# Altium PCB UC-526 - 4.PcbDoc
Units mil, origin at the board's own origin, x right, y up, seen from the top; angles counter-clockwise.
Board outline 1574.8 x 1574.8 mil, 2 copper layers (Top Layer, Bottom Layer); 116 components, 127 nets, 544 pads, 98 vias.
Unrouted connection lines stored in the file: 5.
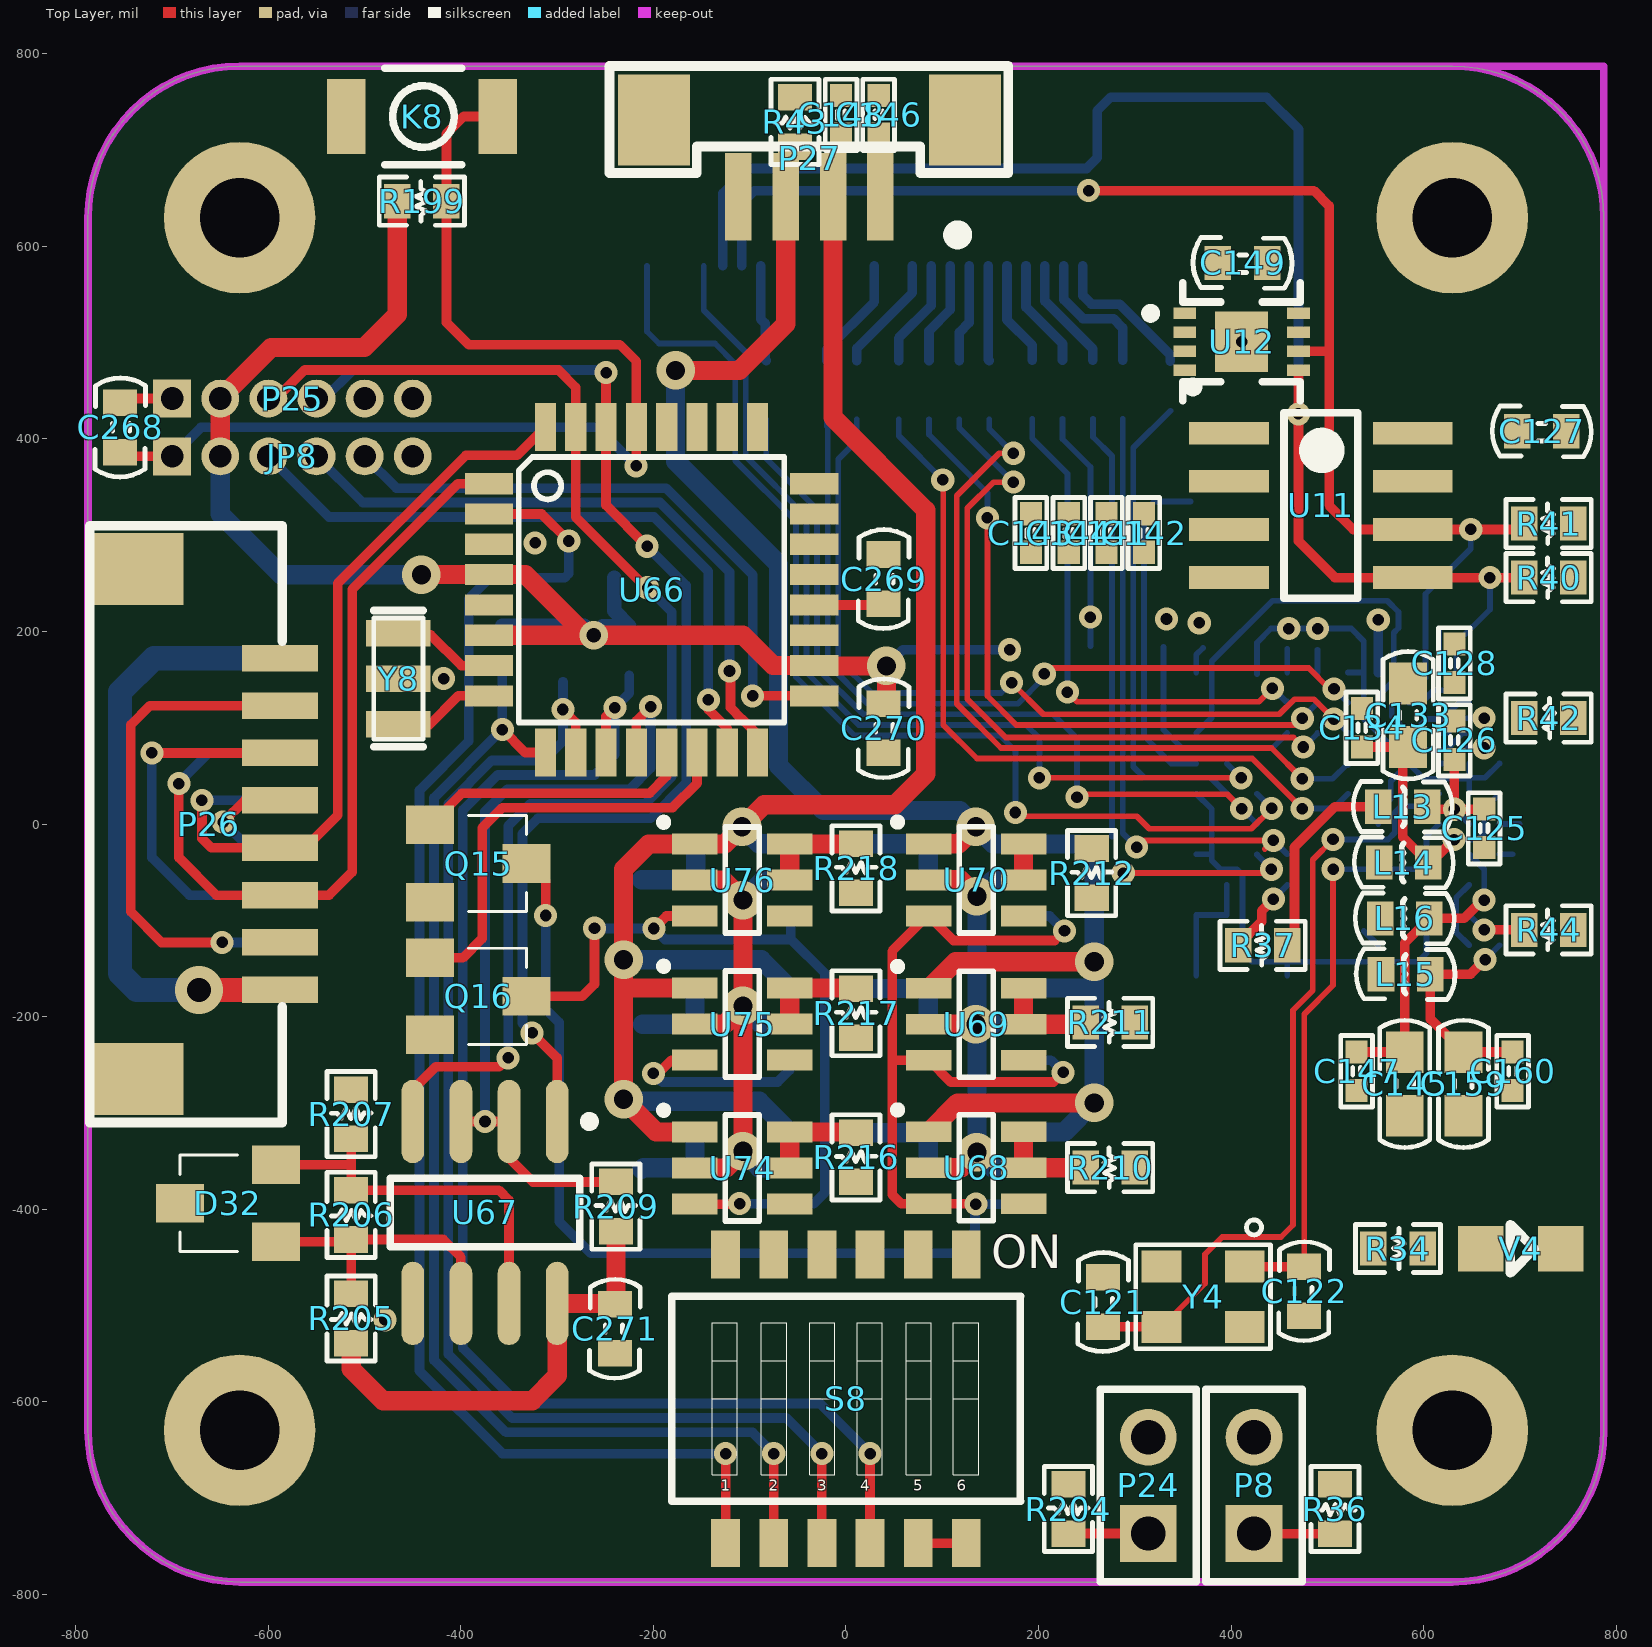
[diagram p0: Top Layer view]
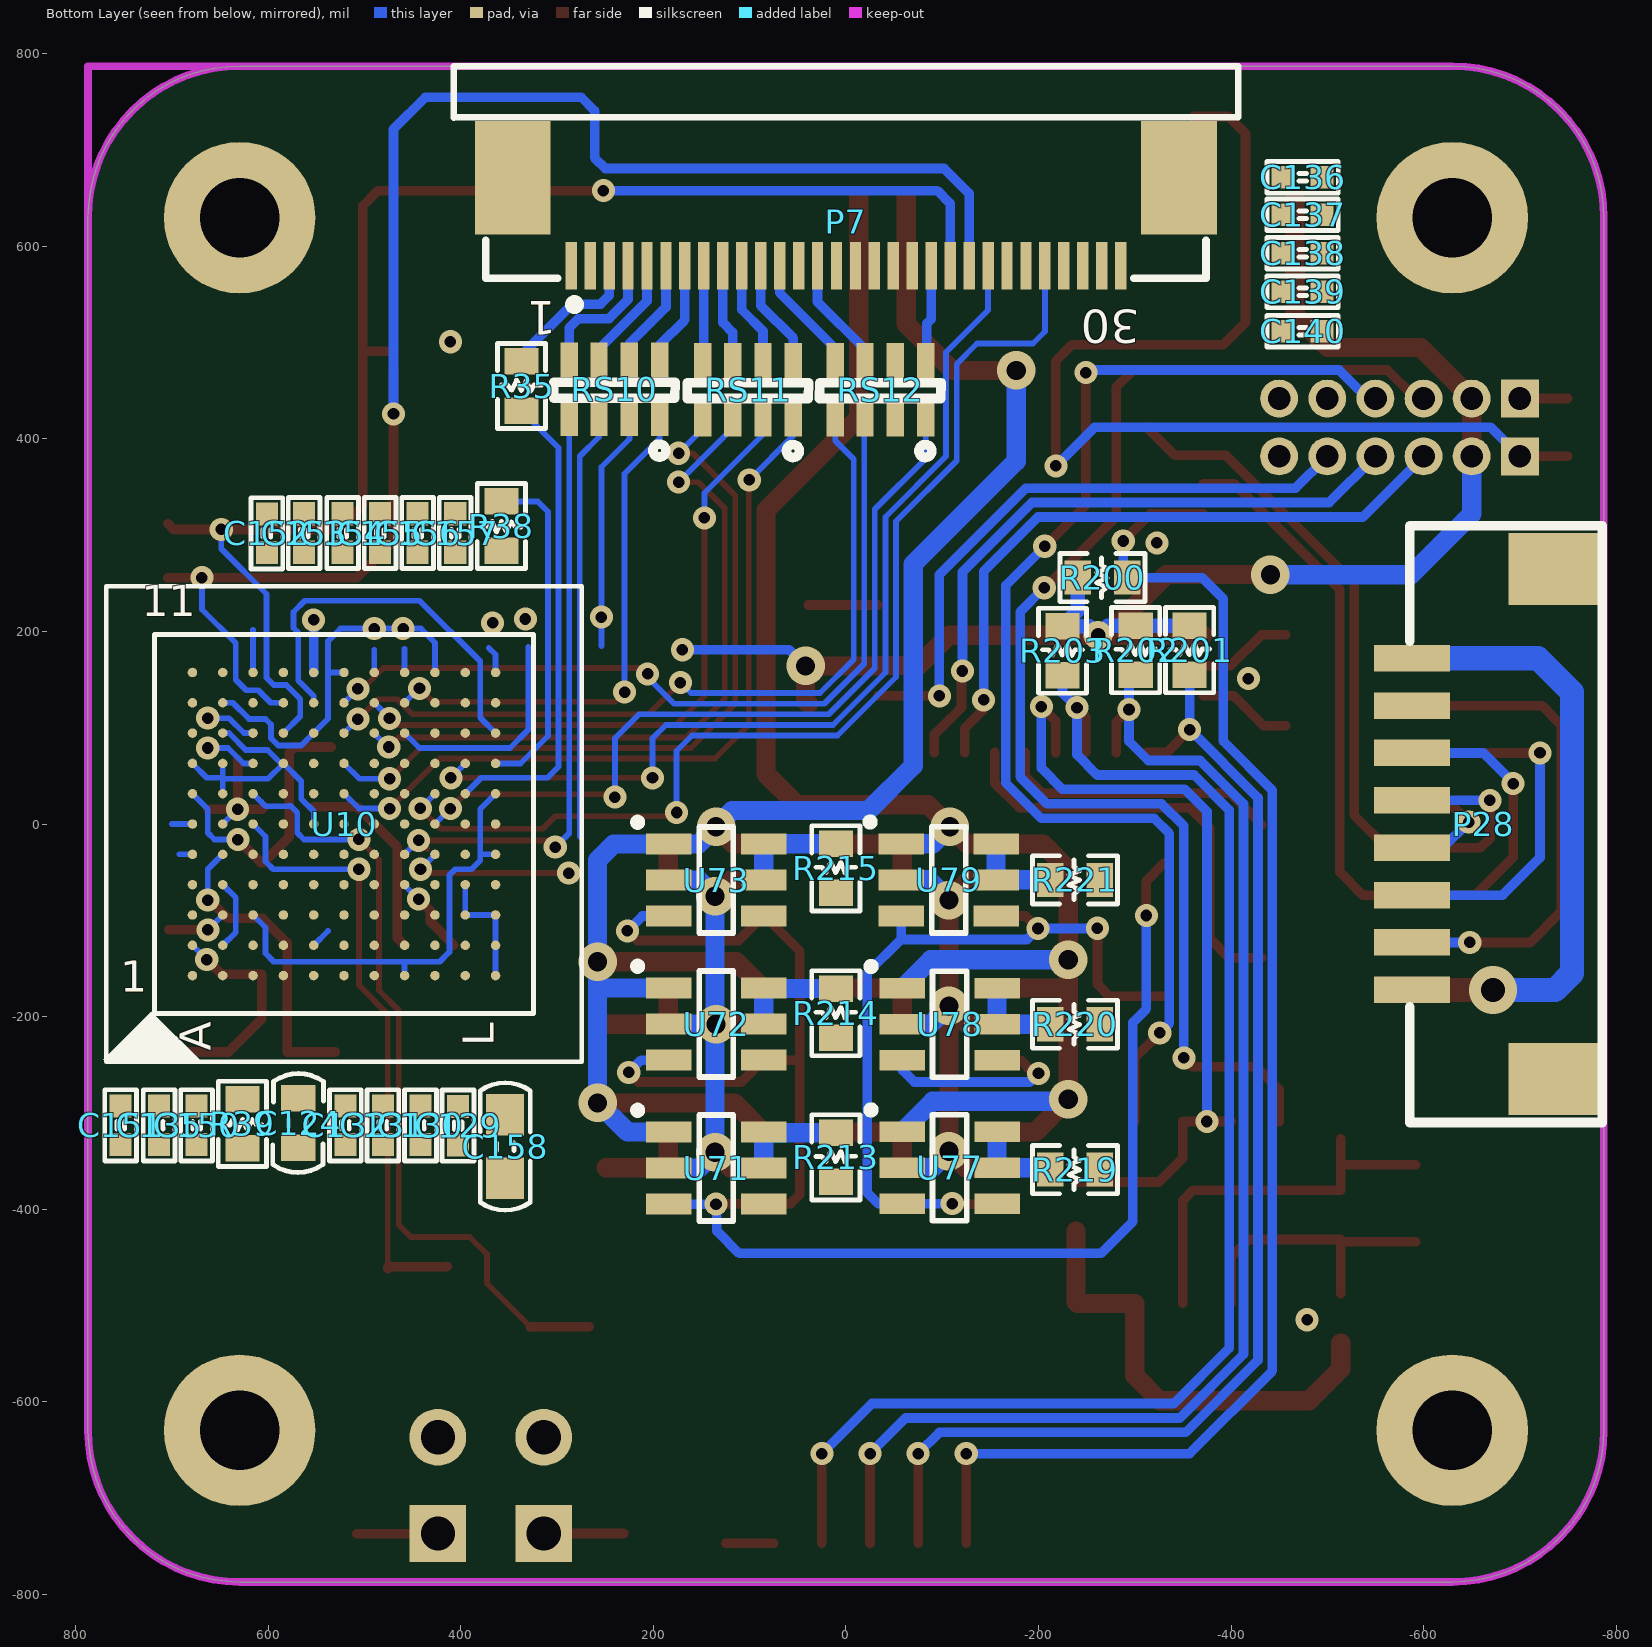
[diagram p1: Bottom Layer view, seen from below]

## Layer stack, top to bottom
Top Layer: signal copper 1.4
Dielectric: dielectric 12.6, FR-4, Dk 4.8
Bottom Layer: signal copper 1.4

## Board outline
-787.4,-629.92 -787.4,629.92 cw(c-629.92,629.92) -629.92,787.4 629.92,787.4 cw(c629.92,629.92) 787.4,629.92 787.4,-629.92 cw(c629.92,-629.92) 629.92,-787.4 -629.92,-787.4 cw(c-629.92,-629.92)

## Design rules (kind name [scope] priority, off if disabled: settings)
Clearance [All] p1: gap=5
DiffPairsRouting [All] p1: maxlimit=10 minlimit=10 mostfreqgap=10 maxuncoupledlength=500
PolygonConnect [All] p1: connectstyle=Relief reliefconductorwidth=10 reliefentries=4 polygonreliefangle="90 Angle"
RoutingVias [All] p1: holewidth=28 width=50 viastyle="Through Hole" minholewidth=28 minwidth=50 maxholewidth=28 maxwidth=50
SilkscreenOverComponentPads [All] p1: minsilkscreentomaskgap=10
SolderMaskExpansion [All] p1: expansion=4
Width [All] p1: maxlimit=50 minlimit=5 preferedwidth=10
26 further rules are at their usual default settings.

## Classes and differential pairs
differential pair SST: +SST_P -SST_N

## Components (designator, comment, footprint, x,y, rotation, side; value= is the part's Value field where it differs from the comment)
C121 "12pF" 0603S-CAP 267,-496.59 r270 top
C122 "12pF" 0603S-CAP 476,-485.41 r90 top
C124 "0.1u" 0603S-CAP 569,-310.59 r90 bottom
C125 "0.1u" C0402 663,-4.41 r270 top
C126 "0.01u" C0402 632,87 r90 top
C127 "0.1uF" 0603S-CAP 722.8,408 r180 top
C128 "0.1u" C0402 632,167 r90 top
C129 "0.01u" C0402 403,-313.31 r270 bottom
C130 "0.01u" C0402 442,-313 r270 bottom
C131 "0.01u" C0402 481,-313 r270 bottom
C132 "0.01u" C0402 520,-313 r270 bottom
C133 "2.2u" C0805S-CAP 584,113 r90 top
C134 "0.1u" C0402 536,100 r90 top
C135 "0.01u" C0402 713.5,-313 r270 bottom
C136 "0.01u" C0402 -474.31,671.84 r180 bottom
C137 "0.01u" C0402 -474.31,632.92 r180 bottom
C138 "0.01u" C0402 -474.31,592.92 r180 bottom
C139 "0.01u" C0402 -474.31,552.92 r180 bottom
C140 "0.01u" C0402 -474.31,511.92 r180 bottom
C141 "0.1u" C0402 270.5,302.31 r90 top
C142 "0.1u" C0402 309.5,302.31 r90 top
C143 "0.1u" C0402 192.08,302.31 r90 top
C144 "0.1u" C0402 231.5,302.31 r90 top
C145 "22u" C0805S-CAP 580.5,-270 r270 top
C146 "0.1u" C0402 34,736.63 r270 top
C147 "0.1u" C0402 530.5,-256.82 r270 top
C148 "0.1u" C0402 -5,736.63 r270 top
C149 "0.1u" 0603S-CAP 412,583 r180 top
C150 "0.1u" C0402 674.58,-313 r270 bottom
C151 "0.1u" C0402 753.5,-313 r270 bottom
C152 "0.1u" C0402 601.5,302 r90 bottom
C153 "0.1u" C0402 562.84,302.31 r90 bottom
C154 "0.1u" C0402 522.92,302.31 r90 bottom
C155 "0.1u" C0402 483.92,302.31 r90 bottom
C156 "0.1u" C0402 444.92,302.31 r90 bottom
C157 "0.1u" C0402 405.92,302.31 r90 bottom
C158 "22u" C0805S-CAP 354,-335 r270 bottom
C159 "22u" C0805S-CAP 641.5,-270 r270 top
C160 "0.1u" C0402 692.5,-256.82 r270 top
C268 "0.1uF" C0603 -754,412 r90 top
C269 "0.1uF" C0603 39,254.41 r90 top
C270 "0.1uF" C0603 39,99.41 r90 top
C271 "0.1u" C0603 -240,-524.39 r270 top
D32 "SM712" SOT23-3 -642,-394 r90 top
JP8 "Header 3X2" MHDR1X6 -700,382 r0 top
K8 "SW-PB" 157SW -519,735 r180 top
L13 "磁珠" L0603 578.41,18 r180 top
L14 "磁珠" L0603 579.41,-40 r0 top
L15 "磁珠" L0603 581.41,-156 r0 top
L16 "磁珠" L0603 580.41,-98 r0 top
P7 "30PIN" FH12-30S-0.5SH 0,625.55 r180 bottom locked
P8 "Header 2" HDR1X2 424,-737 r90 top
P24 "Header 2" HDR1X2 314,-737 r90 top
P25 "FTDI Basic" MHDR1X6 -700,442 r0 top
P26 "Header 8" SH_1.25MM*8 -735.66,0 r270 top locked
P27 "Header 4" SMT_1.25MM*4 -38,692 r0 top
P28 "Header 8" SH_1.25MM*8 -735.66,0 r90 bottom locked
Q15 "BSS138" "SOT-23 (STANDARD)" -432,-1 r270 top
Q16 "BSS138" "SOT-23 (STANDARD)" -432,-139 r270 top
R34 "10K" 0603S-RES 573.41,-441 r180 top
R35 "0" 0603S-RES 337,455 r270 bottom
R36 "4.7K" 0603S-RES 508,-711.59 r90 top
R37 "4.7K" 0603S-RES 432.88,-125.96 r0 top
R38 "4.7K" 0603S-RES 358,309.53 r90 bottom
R39 "4.7K" 0603S-RES 627,-311.41 r90 bottom
R40 "4.7K" 0603S-RES 730,256 r0 top
R41 "4.7K" 0603S-RES 730,312 r0 top
R42 "0" 0603S-RES 730,110 r180 top
R43 "6.04K-1%" 0603S-RES -53,729.41 r90 top
R44 "200-1%" 0603S-RES 730,-110 r0 top
R199 "10K" R0603 -440.59,647 r180 top
R200 "10K" R0603 -266.41,256 r0 bottom
R201 "10K" R0603 -357,180.59 r90 bottom
R202 "10K" R0603 -301,180.59 r90 bottom
R203 "10K" R0603 -225,180 r90 bottom
R204 "10K" R0603 231,-711.59 r90 top
R205 "4.7K" R0603 -514,-513.59 r270 top
R206 "120" R0603 -514,-406 r270 top
R207 "4.7K" R0603 -514,-301.41 r90 top
R209 "10K" R0603 -239,-397.41 r90 top
R210 "5.1" R0603 274.49,-357 r180 top
R211 "5.1" R0603 274.49,-206 r180 top
R212 "5.1" R0603 255.28,-51 r90 top
R213 "5.1" R0603 10.5,-346.21 r90 bottom
R214 "5.1" R0603 10.5,-196.55 r90 bottom
R215 "5.1" R0603 10.5,-45.96 r90 bottom
R216 "5.1" R0603 10.5,-346.21 r90 top
R217 "5.1" R0603 10.5,-196.55 r90 top
R218 "5.1" R0603 10.5,-45.96 r90 top
R219 "5.1" R0603 -237.92,-359 r0 bottom
R220 "5.1" R0603 -237.92,-208 r0 bottom
R221 "5.1" R0603 -237.92,-58 r0 bottom
RS10 "22" NC06-4 193.1,420.84 r0 bottom
RS11 "22" NC06-4 54.34,420.33 r0 bottom
RS12 "22" NC06-4 -83.17,420.33 r0 bottom
S8 "SW DIP-6" DIP_SW_6WAY_SMD 0,-597 r0 top locked
U10 "FX3_121_BUMP_0" 121_BGA_FX3 521.45,0 r90 bottom locked
U11 "M24M02-DRMN6TP" SOIC127P600X175-8N 493.42,331 r0 top
U12 "ATSHA204-MAH-DA-T" UDFN 411,501 r0 top
U66 "ATMEGA328" TQFP32-08 -202,243.34 r0 top locked
U67 "MAX485CSA" SOIC-8 -375,-403.51 r270 top
U68 "AL5802" SOT26 135.28,-357 r0 top
U69 "AL5802" SOT26 135.28,-208 r0 top
U70 "AL5802" SOT26 135.28,-58 r0 top
U71 "AL5802" SOT26 134.72,-357.4 r180 bottom
U72 "AL5802" SOT26 134.72,-207.79 r180 bottom
U73 "AL5802" SOT26 134.72,-58.19 r180 bottom
U74 "AL5802" SOT26 -107.72,-357.4 r0 top
U75 "AL5802" SOT26 -107.72,-207.79 r0 top
U76 "AL5802" SOT26 -107.72,-58.19 r0 top
U77 "AL5802" SOT26 -107.72,-357 r180 bottom
U78 "AL5802" SOT26 -107.72,-208 r180 bottom
U79 "AL5802" SOT26 -106.72,-58 r180 bottom
V4 "Red" LED0805S 701,-441 r0 top
Y4 "19.2MHZ" "爱普生晶振3.2×2.5MM - 无源" 371,-491 r180 top
Y8 "16MHz" RESONATOR-SMD -465,151 r90 top

## Footprints (in the part's own frame and the unit in brackets; to place one, negate y for a bottom-side part, rotate by r counter-clockwise, add the part's x,y. Pads: shape width x height; smd on the part's side, far side on the other; paste and mask are expansions set on the pad)
121_BGA_FX3 [mil]
  round 9.85 smd: A1(-157.45,157.45) A2(-125.96,157.45) A3(-94.47,157.45) A4(-62.98,157.45) A5(-31.49,157.45) A6(0,157.45) A7(31.49,157.45) A8(62.98,157.45) A9(94.47,157.45) A10(125.96,157.45) A11(157.45,157.45) B1(-157.45,125.96) B2(-125.96,125.96) B3(-94.47,125.96) B4(-62.98,125.96) B5(-31.49,125.96) B6(0,125.96) B7(31.49,125.96) B8(62.98,125.96) B9(94.47,125.96) B10(125.96,125.96) B11(157.45,125.96) C1(-157.45,94.47) C2(-125.96,94.47) C3(-94.47,94.47) C4(-62.98,94.47) C5(-31.49,94.47) C6(0,94.47) C7(31.49,94.47) C8(62.98,94.47) C9(94.47,94.47) C10(125.96,94.47) C11(157.45,94.47) D1(-157.45,62.98) D2(-125.96,62.98) D3(-94.47,62.98) D4(-62.98,62.98) D5(-31.49,62.98) D6(0,62.98) D7(31.49,62.98) D8(62.98,62.98) D9(94.47,62.98) D10(125.96,62.98) D11(157.45,62.98) E1(-157.45,31.49) E2(-125.96,31.49) E3(-94.47,31.49) E4(-62.98,31.49) E5(-31.49,31.49) E6(0,31.49) E7(31.49,31.49) E8(62.98,31.49) E9(94.47,31.49) E10(125.96,31.49) E11(157.45,31.49) F1(-157.45,0) F2(-125.96,0) F3(-94.47,0) F4(-62.98,0) F5(-31.49,0) F6(0,0) F7(31.49,0) F8(62.98,0) F9(94.47,0) F10(125.96,0) F11(157.45,0) G1(-157.45,-31.49) G2(-125.96,-31.49) G3(-94.47,-31.49) G4(-62.98,-31.49) G5(-31.49,-31.49) G6(0,-31.49) G7(31.49,-31.49) G8(62.98,-31.49) G9(94.47,-31.49) G10(125.96,-31.49) G11(157.45,-31.49) H1(-157.45,-62.98) H2(-125.96,-62.98) H3(-94.47,-62.98) H4(-62.98,-62.98) H5(-31.49,-62.98) H6(0,-62.98) H7(31.49,-62.98) H8(62.98,-62.98) H9(94.47,-62.98) H10(125.96,-62.98) H11(157.45,-62.98) J1(-157.45,-94.47) J2(-125.96,-94.47) J3(-94.47,-94.47) J4(-62.98,-94.47) J5(-31.49,-94.47) J6(0,-94.47) J7(31.49,-94.47) J8(62.98,-94.47) J9(94.47,-94.47) J10(125.96,-94.47) J11(157.45,-94.47) K1(-157.45,-125.96) K2(-125.96,-125.96) K3(-94.47,-125.96) K4(-62.98,-125.96) K5(-31.49,-125.96) K6(0,-125.96) K7(31.49,-125.96) K8(62.98,-125.96) K9(94.47,-125.96) K10(125.96,-125.96) K11(157.45,-125.96) L1(-157.45,-157.45) L2(-125.96,-157.45) L3(-94.47,-157.45) L4(-62.98,-157.45) L5(-31.49,-157.45) L6(0,-157.45) L7(31.49,-157.45) L8(62.98,-157.45) L9(94.47,-157.45) L10(125.96,-157.45) L11(157.45,-157.45)
  silkscreen extent -247,-247 247,250
157SW [mil]
  rect 40x78 smd: 1(0,0) 2(-157.5,0)
  silkscreen extent -120,-50 -40,50
0603S-CAP [mm]
  rect 0.7x0.9 smd: 1(-0.65,0) 2(0.65,0)
  silkscreen extent -1.31,-0.67 1.31,0.67
0603S-RES [mm]
  rect 0.7x0.9 smd: 1(-0.65,0) 2(0.65,0)
  silkscreen extent -1.12,-0.64 1.12,0.64
C0402 [mil]
  rect 24x23 smd: 1(-20,0) 2(20,0)
  silkscreen extent -37,-17 37,17, body extent -20,-10 19,10, height 20
C0603 [mm]
  rect 0.7x0.9 smd: 1(0.65,0) 2(-0.65,0)
  silkscreen extent -1.31,-0.67 1.31,0.67
C0805S-CAP [mm]
  rect 1.1x1 smd: 1(0.838,0) 2(-0.838,0)
  silkscreen extent -1.68,-0.66 1.68,0.66
DIP_SW_6WAY_SMD [mm]
  rect 0.76x1.27 smd: 1(-3.175,-3.81) 2(-1.905,-3.81) 3(-0.635,-3.81) 4(0.635,-3.81) 5(1.905,-3.81) 6(3.175,-3.81) 7(3.175,3.81) 8(1.905,3.81) 9(0.635,3.81) 10(-0.635,3.81) 11(-1.905,3.81) 12(-3.175,3.81)
  silkscreen extent -4.6,-2.7 4.6,2.7
FH12-30S-0.5SH [mm]
  rect 0.3x1.25 smd: 1(-7.25,-1.162) 2(-6.75,-1.162) 3(-6.25,-1.162) 4(-5.75,-1.162) 5(-5.25,-1.162) 6(-4.75,-1.162) 7(-4.25,-1.162) 8(-3.75,-1.162) 9(-3.25,-1.162) 10(-2.75,-1.162) 11(-2.25,-1.162) 12(-1.75,-1.162) 13(-1.25,-1.162) 14(-0.75,-1.162) 15(-0.25,-1.162) 16(0.25,-1.162) 17(0.75,-1.162) 18(1.25,-1.162) 19(1.75,-1.162) 20(2.25,-1.162) 21(2.75,-1.162) 22(3.25,-1.162) 23(3.75,-1.162) 24(4.25,-1.162) 25(4.75,-1.162) 26(5.25,-1.162) 27(5.75,-1.162) 28(6.25,-1.162) 29(6.75,-1.162) 30(7.25,-1.162)
  rect 2x3 smd: 31(-8.79,1.163) 31(8.79,1.163)
  silkscreen extent -10.35,-2.31 10.35,4.11
HDR1X2 [mm]
  rect 1.5x1.5 hole 0.9: 1(0,0)
  round 1.5 hole 0.9: 2(2.54,0)
  silkscreen extent -1.27,-1.27 3.81,1.27
L0603 [mm]
  rect 0.7x0.9 smd: 1(-0.65,0) 2(0.65,0)
  silkscreen extent -1.31,-0.67 1.31,0.67
LED0805S [mm]
  rect 1.2x1.2 smd: 1(-1.05,0) 2(1.05,0)
  silkscreen extent -0.27,-0.64 0.36,0.63, body extent -0.98,-0.46 1.08,0.45, height 0.85
MHDR1X6 [mm]
  rect 1x1 hole 0.6: 1(0,0)
  round 1 hole 0.6: 2(1.27,0) 3(2.54,0) 4(3.81,0) 5(5.08,0) 6(6.35,0)
NC06-4 [mil]
  rect 18x36 smd: 1(94.4,-0.16) 2(63.39,-0.16) 3(31.9,-0.16) 4(0.4,-0.16) 5(0.4,-61.16) 6(31.9,-61.16) 7(63.39,-61.16) 8(94.4,-61.16)
  silkscreen extent -16,-38 111,40
R0603 [mm]
  rect 0.7x0.9 smd: 1(0.65,0) 2(-0.65,0)
  silkscreen extent -1.12,-0.64 1.12,0.64
RESONATOR-SMD [mm]
  rect 0.7x1.7 smd: 1(-1.2,0) 2(0,0) 3(1.2,0)
  silkscreen extent -1.8,-0.65 1.8,0.65
SH_1.25MM*8 [mm]
  rect 0.7x2 smd: 1(-4.375,3.75) 2(-3.125,3.75) 3(-1.875,3.75) 4(-0.625,3.75) 5(0.625,3.75) 6(1.875,3.75) 7(3.125,3.75) 8(4.375,3.75)
  rect 1.9x2.4 smd: 9(-6.731,0) 9(6.731,0)
  silkscreen extent -7.87,-1.27 7.87,3.81
SMT_1.25MM*4 [mm]
  rect 0.7x2.3 smd: 1(1.875,-1.025) 2(0.625,-1.025) 3(-0.625,-1.025) 4(-1.875,-1.025)
  rect 1.9x2.4 smd: 7(-4.1,1) 7(4.1,1)
  silkscreen extent -5.28,-2.16 5.25,2.42
SOIC127P600X175-8N [mm]
  rect 2.1x0.6 smd: 1(-2.425,1.905) 2(-2.425,0.635) 3(-2.425,-0.635) 4(-2.425,-1.905) 5(2.425,-1.905) 6(2.425,-0.635) 7(2.425,0.635) 8(2.425,1.905)
  silkscreen extent -3.5,-2.45 0.98,3.25, body extent -1.95,-2.45 1.95,2.45, height 1.75
SOIC-8 [mm]
  oval 2.2x0.6 smd: 1(-2.4,1.905) 2(-2.4,0.635) 3(-2.4,-0.635) 4(-2.4,-1.905) 5(2.4,-1.905) 6(2.4,-0.635) 7(2.4,0.635) 8(2.4,1.905)
  silkscreen extent -2.52,-2.5 0.9,2.88, body extent -2,-2.5 2,2.5, height 1.75
SOT23-3 [mil]
  rect 40x50 smd: 1(40,-50) 2(-40,-50) 3(0,50)
  silkscreen extent -50,-10 50,50, body extent -59,-52 59,46, height 42
SOT26 [mm]
  rect 1.2x0.55 smd: 1(-1.25,0.95) 2(-1.25,0) 3(-1.25,-0.95) 4(1.25,-0.95) 5(1.25,0) 6(1.25,0.95)
  silkscreen extent -2.17,-1.4 0.45,1.62
"SOT-23 (STANDARD)" [mil]
  rect 40x50 smd: D(40,100) G(0,0) S(80,0)
  silkscreen extent -10,40 90,100, body extent -19,-2 99,96, height 42
TQFP32-08 [mil]
  rect 50x22 smd: 1(-169,110.24) 2(-169,78.74) 3(-169,47.25) 4(-169,15.75) 5(-169,-15.74) 6(-168.99,-47.24) 7(-169,-78.74) 8(-169,-110.24) 17(169.01,-110.23) 18(169,-78.73) 19(169,-47.24) 20(169,-15.74) 21(169,15.75) 22(169,47.25) 23(169,78.74) 24(169,110.24)
  rect 22x50 smd: 9(-110.24,-169) 10(-78.74,-169) 11(-47.24,-168.99) 12(-15.74,-168.99) 13(15.75,-169) 14(47.25,-169) 15(78.74,-169) 16(110.24,-169) 25(110.24,169) 26(78.74,169) 27(47.25,169) 28(15.75,169) 29(-15.75,169) 30(-47.24,169) 31(-78.73,169) 32(-110.23,169)
  silkscreen extent -138,-138 138,138
UDFN [mm]
  rect 0.6x0.3 smd: 1(-1.5,0.75) 2(-1.5,0.25) 3(-1.5,-0.25) 4(-1.5,-0.75) 5(1.5,-0.75) 6(1.5,-0.25) 7(1.5,0.25) 8(1.5,0.75)
  rect 1.4x1.6 smd: 4(0,0)
  silkscreen extent -2.52,-1.55 1.55,1.55, body extent -1.5,-1 1.52,1, height 0.6
"爱普生晶振3.2×2.5MM - 无源" [mm]
  rect 1.05x0.85 smd: 1(-1.1,-0.8) 2(1.1,0.8) 3(1.1,-0.8) 4(-1.1,0.8)
  Top Layer pour cut-out: -1.778,1.372 -1.778,-1.372 1.778,-1.372 1.778,1.372
  silkscreen extent -1.78,-2.03 1.78,1.37

## Part data
C121 C122: library part "CAP CER SMT 4.3pF 0805", "CAP CER SMT 4.3pF 0805"
C124: library part Cap, "50V/8.2u/0805"
C125 C126 C128 C129 C130 C131 C132 C133 C134 C135 C136 C137 C138 C139 C140 C141 C142 C143 C144 C145 C146 C147 C148 C150 C151 C152 C153 C154 C155 C156 C157 C158 C159 C160: library part CAP0805, "Capacitor"
C127: library part "CAP SMT 0.1uF 16V X7R", "CAP SMT 0.1uF 16V X7R"
C149: library part CAP, "RC=1206"
C268 C269 C270: library part "CAP SMT C100nF25V10%X7R", "Capacitor"
C271: library part Cap, "Capacitor"
JP8: "Header, 3-Pin, Dual row"
K8: "Switch"
L13 L14 L15 L16: library part Inductor, "Inductor"
P7: library part "Header 30", "Header, 30-Pin"
P8 P24: "Header, 2-Pin"
P25: library part ARDUINO_SERIAL_PROGRAMPTH
P26 P28: "Header, 8-Pin"
P27: "Header, 4-Pin"
Q15 Q16: library part NMOS
R34 R35 R36 R37 R38 R39 R40 R41 R42 R43 R44 R199 R200 R201 R202 R203 R204 R205 R206 R207 R209 R210 R211 R212 R213 R214 R215 R216 R217 R218 R219 R220 R221: library part Res2, "Resistor"
RS10 RS11 RS12: library part RN4
S8: "DIP Switch, 6 Position, SPST"
U11: library part 24LC64-I/SN, "IC EEPROM 64KBIT 400KHZ 8SOIC"
U12: library part AT24C128
U66: library part ATMEGA168
U67: library part MAX3485CSA
V4: library part LED0, "Typical INFRARED GaAs LED"
Y4: library part "XTAL 32.768KHZ", "Crystal, CRYSTAL 32.768KHZ 6PF SMD"
Y8: library part RESONATORSMD

## Free pads (board coordinates)
  round 157.48 hole 82.68: 0(-629.92,-629.92) 0(-629.92,629.92) 0(629.92,-629.92) 0(629.92,629.92)

## Via types
v1: diameter 24, hole 12, Top Layer to Bottom Layer, tented both sides, 80 vias
v2: diameter 40, hole 20, Top Layer to Bottom Layer, tented both sides, 15 vias
v3: diameter 50, hole 25, Top Layer to Bottom Layer, tented both sides, 1 vias
v4: diameter 30, hole 15, Top Layer to Bottom Layer, tented both sides, 1 vias
v5: diameter 24, hole 12, Top Layer to Bottom Layer, 1 vias

## Nets (pads, with @x,y where several pads share a name; then routed paths per layer and width w, separated by ;. In a path a pad name is that pad's centre, name@x,y a point inside that pad or via, vN(x,y) a via of type N, cw(c..) or ccw(c..) an arc to the next point about the centre after c; other vN are vias at no path point)
A0: U66.23
A1: U66.24
A2: U66.25
A3: U66.26
A4: U66.27
A5: U66.28
A6: U66.19
A7: U66.22
AD1: R200.2 S8.1 U66.2 | length 1514.6
  Top Layer w10: U66.2 -316.09,322.09 v1(-288,294) ; S8.1 v1(-125,-654)
  Bottom Layer w10: v1@-287,293 v1(-288,294) -288,260 R200.2 -366,256 -370,256 -392,234 -392,86 -443,35 -443,-568 -357,-654 v1(-125,-654)
AD2: R201.2 S8.2 U66.9 | length 1282.3
  Top Layer w10: v1(-357,98) -333.34,74.34 U66.9 ; S8.2 v1(-75,-654)
  Bottom Layer w10: R201.2 v1(-357,98) -357.21,98 -428,27.21 -428,-557 -353,-632 -97,-632 v1(-75,-654)
AD3: R202.2 S8.3 U66.10 | length 1353.6
  Top Layer w10: v1(-294,119) -280.74,105.74 U66.10 ; S8.3 v1(-25,-654)
  Bottom Layer w10: R202.2@-294,148 v1(-294,119) -294,86 -314,66 -325,66 -368,66 -413,21 -413,-550.79 -346.79,-617 -62,-617 v1(-25,-654)
AD4: R203.2 S8.4 U66.11 | length 1441.5
  Top Layer w10: U66.11 -249.24,111.76 v1(-240,121) ; S8.4 v1(25,-654)
  Bottom Layer w10: R203.2 -225,136 v1(-240,121) -240,72 -261,51 -361.79,51 -398,14.79 -398,-544.57 -340.57,-602 -27,-602 v1(25,-654)
AREF: C269.2 U66.20 | length 72
  Top Layer w10: U66.20 C269.2@39,227.6
AVDD: C133.2 C134.1 L14.2 U10.A7 | length 306.6
  Top Layer w10: C134.1@535,80 572.82,80 578.41,74.41 578.41,46 ; 578.41,52.41 578.41,46 ; L14.2@608,-40 L14.2@607.89,-40 ; v1(631.67,-16.23) L14.2@607.89,-40 ; 578.41,46 578.41,-13.41 L14.2 L14.2@607.89,-40
  Bottom Layer w6: v1(631.67,-16.23) 631.67,-21.67 635,-21.67 635,-16 656,-16 663,-9 663,15.59 U10.A7
CLK_OUT: U10.D6
D0_IO: P7.18
D1_IO: P7.17
D2: P26.5 P28.5 S8.8 U66.32 | length 805.9
  Top Layer w10: v1@-669,25 -669,-15 -659.39,-24.61 P26.5 ; P26.5@-586.63,-26 P26.5 ; U66.32 -341.58,383 -395,383 -528,250 -528,9 -561.61,-24.61 P26.5
  Bottom Layer w10: v1(-669,24.61) P28.5
D2_IO: P7.16
D3: P26.6 P28.6 S8.7 U66.1 | length 883
  Top Layer w10: v1@-693,43 -693,-35 -654.18,-73.82 P26.6 -536.82,-73.82 -513,-50 -513,243.79 -403.21,353.58 U66.1
  Bottom Layer w10: v1@-693,43 -662.18,73.82 P28.6
  other v1: -693,42
D3_IO: P7.15
D4_IO: P7.14 RS12.7 | length 118.7
  Bottom Layer w10: RS12.7 -19.78,493.22 29.53,542.53 P7.14
D5_IO: P7.12 RS12.8 | length 122.2
  Bottom Layer w10: RS12.8 11.23,494.23 68.9,551.9 P7.12
D6_IO: P7.11 RS11.5 | length 112.3
  Bottom Layer w10: RS11.5 54.74,504.74 88.58,538.58 P7.11
D7_IO: P7.10 RS11.6 | length 107.4
  Bottom Layer w10: RS11.6 86.23,512.23 108.27,534.27 P7.10
D8: R209.1 U66.12 U67.2 U67.3 | length 839.7
  Top Layer w10: U67.3 v1(-375,-309.02) U67.2 -350,-347 -325.18,-371.82 R209.1 ; U66.12 -217.75,107.25 v1(-203,122)
  Bottom Layer w10: v1(-375,-309.02) -375,13 -352,36 -225,36 -203,58 v1(-203,122)
D8_IO: P7.9 RS11.7 | length 102.5
  Bottom Layer w10: RS11.7 117.73,510.73 127.95,520.95 P7.9
D9: Q15.G U66.13 | length 291.4
  Top Layer w10: Q15.G -399,32 -204,32 -186.25,49.75 U66.13
D9_IO: P7.8 RS11.8 | length 98.7
  Bottom Layer w10: P7.8 147.64,482.6 RS11.8
D10: Q16.G U66.14 | length 463.8
  Top Layer w10: Q16.G -398,-139 -378,-119 -378,-4 -357,17 -248,17 ; -260,17 -248,17 ; U66.14 -154.75,42.25 -180,17 -248,17
D10_IO: P7.7 RS10.5 | length 108.6
  Bottom Layer w10: P7.7 167.32,523.68 193.5,497.5 RS10.5
D11_IO: P7.6 RS10.6 | length 113.5
  Bottom Layer w10: P7.6 187.01,536.99 225,499 RS10.6
DTR: C268.1 P25.1 | length 56.7
  Top Layer w10: C268.1@-749.59,442 P25.1 ; P25.1@-694,430 P25.1@-689,435
FRV_IO: P7.4 RS10.8 | length 141.7
  Bottom Layer w10: P7.4 226.38,544.84 246.21,525 278,525 287.5,515.5 RS10.8
FX3_CTL0: P7.23 U10.K8 | length 1008.6
  Top Layer w6: v1(201,48) v1(410.47,48)
  Bottom Layer w6: P7.23 -147.64,533.64 -104,490 -104,382 -41,319 -41,157.33 13.33,103 187,103 201,89 v1(201,48) ; U10.K8 v1(410.47,48)
FX3_CTL1: R35.2 U10.K7 | length 494.4
  Bottom Layer w6: R35.2 298.5,390.91 298.5,59.5 310,48 378.98,48 U10.K7
FX3_CTL2: P7.26 U10.J7 | length 1152.5
  Top Layer w6: v1(176,12) 180,8 302,8 315,-5 420.95,-5 v1(442.21,16.26)
  Bottom Layer w6: P7.26 -206.69,511.69 -194.19,499.19 -136.19,499.19 -115,478 -115,377.44 -52,314.44 -52,152.77 8.77,92 160,92 176,76 v1(176,12) ; U10.J7 v1(442.21,16.26)
FX3_CTL3: U10.H7
FX3_CTL4_SW: U10.G7
FX3_CTL5: U10.G6
FX3_CTL6: U10.K6
FX3_CTL7: U10.H8
FX3_CTL8: U10.G5 V4.2
FX3_CTL11: RS10.2 U10.J5 | length 619.7
  Top Layer w6: v1(288,-51) 438,-51 v1(442,-47)
  Bottom Layer w6: RS10.2 256.5,402.01 276.5,382 276.5,-13 ; U10.J5 426.98,-31.98 v1(442,-47)
FX3_CTL12: RS10.1 U10.H5 | length 629.1
  Top Layer w6: v1(302,-24) 309,-17 v1(443.98,-17) 434.98,-26
  Bottom Layer w6: RS10.1 287.5,-9.5 v1(302,-24) ; v1(443.98,-17) U10.H5
FX3_CTL15: R38.2 U10.L8 | length 352.2
  Bottom Layer w6: R38.2 320.12,335.12 309.5,324.5 309.5,91.48 338,62.98 U10.L8
FX3_DQ0: RS12.2 U10.F10 | length 846.8
  Top Layer w6: v1(206,156) 212,162 480.64,162 502.23,140.41 v1(507,140.41) v1@506.68,140.73
  Bottom Layer w6: RS12.2@-19.77,413.19 RS12.2 -19,419.72 -19,166.44 22.44,125 178.64,125 v1@204.79,151.16 ; v1(507,140.41) U10.F10
FX3_DQ1: RS12.1 U10.F9 | length 844
  Top Layer w6: v1(172,147) 205,114 450.2,114 465.93,129.73 486.19,129.73 v1(507,108.92) v1@507,112.13
  Bottom Layer w6: RS12.1 11.23,398.23 -8,379 -8,171 27,136 161,136 v1(172,147) ; v1(507,108.92) U10.F9
FX3_DQ2: RS11.4 U10.F7 | length 806.2
  Top Layer w6: v1@101,357.5 101,103 136,68 422,68 v1(474,16)
  Bottom Layer w6: RS11.4@54.74,413.68 RS11.4 54.74,403.26 v1(100.5,357.5) ; v1(474,16) 505.96,16 U10.F7
FX3_DQ3: RS11.3 U10.G10 | length 698.2
  Top Layer w6: v1(147,318) 147,133 177,103 467.48,103 v1(474.21,109.73)
  Bottom Layer w6: RS11.3@86.23,413.68 RS11.3 86.23,404.77 147,344 v1(147,318) ; v1(474.21,109.73) v1@474.21,108.43 ; U10.G10 474.87,110.87 474.87,109.08 v1@474.21,108.43 ; v1@474.21,108.43 471,105.21 474.21,105.21 v1@474.21,108.43
FX3_DQ4: RS11.2 U10.G9 | length 743.7
  Top Layer w6: v1(173.87,355.13) 153.13,355.13 126,328 126,130 166,90 465,90 v1(475,80)
  Bottom Layer w6: RS11.2 117.73,411.27 v1@179,350 ; v1@475.5,79.5 489.96,93.96 U10.G9
FX3_DQ5: RS11.1 U10.F8 | length 793.8
  Top Layer w6: v1(173.87,385.13) 159.13,385.13 115,341 115,125 161,79 345,79 ; 337,79 345,79 ; v1(474,47) 442,79 345,79
  Bottom Layer w6: RS11.1 148.74,410.26 v1(173.87,385.13) ; v1(474,47) 505.47,47 U10.F8 U10.F8@521.45,61.45
FX3_DQ6: RS10.4 U10.H10 | length 552.1
  Top Layer w6: v1(230,137) 240,127 429,127 v1(443,141)
  Bottom Layer w6: RS10.4@193.5,414.18 RS10.4 193.5,400.5 230,364 v1(230,137) ; v1(443,141) 443.43,141 U10.H10 U10.H10@458.47,127.53
FX3_DQ7: RS10.3 U10.H9 | length 483.6
  Bottom Layer w6: RS10.3@225,414.18 RS10.3 225,400 254,371 254,185 ; 330,184 330,98 349,79 443,79 U10.H9
  other v1: 333,213 254,215
FX3_DQ8: U10.J10
FX3_DQ9: U10.J9
FX3_DQ10: U10.K11
FX3_DQ11: U10.L10
FX3_DQ12: U10.K10
FX3_DQ13: U10.K9
FX3_DQ14: U10.J8
FX3_DQ15: U10.G8
FX3_I2S_SCL: P7.21 R41.1 U10.D9 U11.6 U12.6 | length 1505
  Top Layer w10: v1(252,658) 486,658 502,642 502,331 527,306 U11.6 v1(649,306) 698.41,306 R41.1 ; U12.6 501.16,491.16
  Bottom Layer w6: U10.D9 567,111.9 567,130 581.53,144.53 594.53,144.53 602,152 602,239 649,286 v1(649,306)
  Bottom Layer w10: P7.21 -108.27,644.73 -95,658 v1(252,658)
FX3_I2S_SDA: P7.22 R40.1 U10.D10 U11.5 U12.5 | length 1647.6
  Top Layer w10: U12.5 v1(470.06,426) 470.06,294 508.06,256 U11.5 656,256 ; v1(669,256) R40.1
  Bottom Layer w6: U10.D10 597.64,125.96 610.57,138.89 622.89,138.89 634,150 634,188 669,223 v1(669,256)
  Bottom Layer w10: P7.22 -127.95,655.05 -102,681 250,681 261,692 261,741 275,755 437,755 470.06,721.94 v1(470.06,426)
FX3_PCLK: RS12.4 U10.J6 | length 842.7
  Top Layer w6: v1(240,28) 243,31 395.98,31 v1(411,15.98)
  Bottom Layer w6: RS12.4 -82.77,379.77 -30,327 -30,161.89 17.89,114 215,114 240,89 v1(240,28) ; v1(411,15.98) U10.J6
FX3_RESET: C124.2 R39.2 U10.C5
FX3_SPI-MISO_UART-TX: U10.C2
FX3_SPI-MOSI_UART-RX: U10.D5
FX3_SPI-SCK_UART-RTS: U10.D4
FX3_SPI-SSN_UART-CTS: U10.C1
GND: C121.1 C122.1 C124.1 C125.2 C126.2 C127.1 C128.2 C129.2 C130.2 C131.2 C132.2 C133.1 C134.2 C135.2 C136.2 C137.2 C138.2 C139.2 C140.2 C141.2 C142.2 C143.2 C144.2 C145.1 C147.2 C149.2 C150.2 C151.2 C152.2 C153.2 C154.2 C155.2 C156.2 C157.2 C158.1 C159.1 C160.2 C269.1 C270.2 C271.1 D32.3 JP8.6 K8.1 P7.1 P7.13 P7.24 P7.25 P24.2 P25.5 P25.6 P26.1 P26.4 P26.7 P27.4 P28.1 P28.4 P28.7 Q15.S Q16.S R42.2 R44.2 R204.1 R207.1 R210.2 R211.2 R212.2 R213.2 R214.2 R215.2 R216.2 R217.2 R218.2 R219.2 R220.2 R221.2 S8.9 S8.10 S8.11 S8.12 U10.A1 U10.A8 U10.B2 U10.B4 U10.B7 U10.B8 U10.B9 U10.D8 U10.E2 U10.E6 U10.G1 U10.G11 U10.K3 U10.K4 U10.L1 U10.L2 U10.L3 U10.L6 U10.L11 U11.4 U12.4 U66.3 U66.5 U66.21 U67.5 U68.4 U69.4 U70.4 U71.4 U72.4 U73.4 U74.4 U75.4 U76.4 U77.4 U78.4 U79.4 Y8.2 | length 701.3
  Top Layer w10: v1(-647,2) -624.39,24.61 P26.4
  Bottom Layer w6: U10.L1 U10.L2 U10.L3 U10.K3 U10.K4 ; U10.L11 364,176 371,183 ; U10.G11 489.96,180.96 ; 538,-111.02 U10.E2 ; U10.E6 552.94,13.21 565.86,26.14 565.86,44.42 U10.D8 ; U10.B2 634,-112.55 634,-76.39 U10.B4 ; U10.B7 647.41,47 ; U10.B8 647.41,47 ; U10.B9 641.03,94.47 623.56,77 600.79,77 586.78,62.98 U10.D8 ; 648.41,48 663.92,48 U10.A8 ; U10.D8 600.41,47 647.41,47
  Bottom Layer w10: v1(-647,2) -620.39,-24.61 P28.4
  other v1: -479,-515 -418,151 490,203 367,209 -323,292
  other v5: 411,501
LIV_IO: P7.5 RS10.7 | length 118.4
  Bottom Layer w10: P7.5 206.69,543.31 256.5,493.5 RS10.7
MISO: JP8.4 U66.16 | length 678.5
  Top Layer w10: v1(-121,159) -120,158 -120,121 -108.35,109.35 -108.12,109.35 -91.76,92.99 U66.16
  Bottom Layer w10: JP8.4 -502,334 -193.21,334 -121,261.79 v1(-121,159)
MOSI: JP8.3 U66.15 | length 702.9
  Top Layer w10: v1(-143,129) -143,119 -123.26,99.26 U66.15
  Bottom Layer w10: JP8.3 -537,319 -199.43,319 -143,262.57 v1(-143,129)
NetC125_1: C125.1 C126.1 L13.1 U10.B6 | length 135.3
  Top Layer w10: L13.1 606.59,15.41 v1(632,15.41) ; v1@632,13.41 v1@634,13.41 ; C126.1 v1(632,15.41) ; C125.1@662.82,15.41 v1(632,15.41)
  Bottom Layer w6: v1(632,15.41) U10.B6
NetP8_1: P8.1 R36.1 | length 84.1
  Top Layer w10: P8.1 424.18,-737.18 R36.1
NetP8_2: P8.2 U10.G4
NetQ15_D: Q15.D U68.3 U69.3 U70.3 U71.3 U72.3 U73.3 | length 1748.8
  Top Layer w10: Q15.D -330,-41 -312,-59 v1(-312,-95) ; 49.4,-245.4 U69.3 108.67,-268 215.65,-268 v1(225.63,-258.02) ; U70.3 111.67,-121 217,-121 ; U70.3@89,-91 48,-132 48,-385 57.4,-394.4 U68.3 v1@134.6,-394.4
  Bottom Layer w10: v1(-312,-95) -312,-192 -298,-206 -298,-413 -265,-446 111,-446 134.09,-422.91 v1@134.09,-394.8 ; v1(135,-394.8) U71.3 ; U72.3 212.81,-245.19 v1(225.63,-258.02) ; U73.3 211.59,-95.59 v1(227,-111)
NetQ16_D: Q16.D U74.3 U75.3 U76.3 U77.3 U78.3 U79.3 | length 1067.2
  Top Layer w10: Q16.D -274,-179 -261.25,-166.25 v1(-261.25,-108.25) ; v1(-199.5,-108.5) -186.59,-95.59 U76.3 ; v1@-194,-258 -181.19,-245.19 U75.3 ; U74.3@-163.8,-394.8 U74.3 -111.2,-394.8 v1@-111,-395
  Bottom Layer w10: v1@-261.25,-108.5 v1(-199.5,-108.5) -188,-120 -57,-120 ; v1(-200,-259) -191,-268 -146,-268 ; -171,-268 -146,-268 ; v1(-110.4,-394.4) U77.3 -33.4,-394.4 -22,-383 -22,-155 -57,-120 ; U78.3 -58.5,-255.5 -71,-268 -146,-268 ; U79.3 -57.5,-119.5 -57,-120
NetR34_1: R34.1 V4.1
NetR37_1: R37.1 U10.H4 | length 84.2
  Top Layer w10: R37.1 431.82,-101.43 431.82,-90.18 v1(444,-78)
  Bottom Layer w6: v1(444,-78) 458.47,-63.53 U10.H4
NetR43_1: U10.C8 | length 53.7
  Bottom Layer w6: U10.C8 625.98,62.98 642,79 v1(663,79)
NetR44_1: R44.1 U10.B3 | length 62.2
  Top Layer w10: v1(662.94,-110) R44.1@703.19,-110
  Bottom Layer w6: U10.B3 v1(662.94,-110)
NetR210_1: R210.1 U68.5 U68.6 | length 101.8
  Top Layer w20: U68.6 U68.5 R210.1
NetR211_1: R211.1 U69.5 U69.6 | length 99.8
  Top Layer w20: U69.6 U69.5 R211.1@246.9,-208
NetR212_1: R212.1 U70.5 U70.6 | length 37.4
  Top Layer w20: U70.5 U70.6
NetR213_1: R213.1 U71.5 U71.6 | length 112.7
  Bottom Layer w20: R213.1 84.89,-320.62 U71.6 U71.5
NetR214_1: R214.1 U72.5 U72.6 | length 112.6
  Bottom Layer w20: R214.1 84.94,-170.96 U72.6 U72.5
NetR215_1: R215.1 U73.5 U73.6 | length 112
  Bottom Layer w20: R215.1 U73.6@85.09,-20.37 ; U73.5 U73.6
NetR216_1: R216.1 U74.5 U74.6 | length 105.8
  Top Layer w20: U74.5 U74.6 R216.1@9.88,-320
NetR217_1: R217.1 U75.5 U75.6 | length 105.8
  Top Layer w20: U75.5 U75.6 R217.1@9.93,-170.39
NetR218_1: R218.1 U76.5 U76.6 | length 106.6
  Top Layer w20: U76.5 U76.6 10.08,-20.79 R218.1
NetR219_1: R219.1 U77.5 U77.6 | length 93.6
  Bottom Layer w20: R219.1 -210.33,-357 U77.5 U77.6
NetR220_1: R220.1 U78.5 U78.6 | length 91.9
  Bottom Layer w20: R220.1@-211.41,-208 U78.5 U78.6
NetR221_1: R221.1 U79.5 U79.6 | length 93.8
  Bottom Layer w20: R221.1 U79.5 U79.6
OSC_IN: U66.7 Y8.3 | length 99.2
  Top Layer w10: Y8.3@-457,196.59 -431.59,196.59 -399.6,164.6 U66.7
OSC_OUT: U66.8 Y8.1 | length 98.8
  Top Layer w10: Y8.1@-457,102.1 -433.9,102.1 -402.89,133.11 U66.8
OTG_ID: R42.1 U10.C9 | length 53.5
  Bottom Layer w6: U10.C9 625.47,94.47 641,110 v1(663,110)
OUT1: P27.2 U74.1 U75.1 U76.1 U77.1 U78.1 U79.1 | length 1818.4
  Top Layer w20: -225.39,-170.39 U75.1 ; U74.1 -197,-320 v2(-231,-286) -231,-47 -204.79,-20.79 U76.1 -125.9,-20.79 v2(-108,-2.89) -85.11,20 51,20 83,52 83,326 -13.39,422.39 P27.2
  Bottom Layer w20: v2@-231,-288 -90.1,-288 U77.1 ; v2(-231,-141) -88.1,-141 U78.1 ; v2(-108,-2.89) -90.29,-20.6 U79.1
OUT2: P27.3 R43.1 U68.1 U69.1 U70.1 U71.1 U72.1 U73.1 | length 1926
  Top Layer w20: v2(-177,471.19) -110.81,471.19 -62.61,519.39 P27.3 ; U68.1 115.89,-289.78 v2(258,-289.78) ; U69.1 113.67,-143 v2(258,-143) ; U70.1 117.29,-20.6 v2(135,-2.89)
  Bottom Layer w20: v2@-177,471 -177,377 -70,270 -70,60.54 -23.46,14 118.11,14 v2(135,-2.89) 152.9,-20.79 U73.1 241.24,-20.79 258,-37.55 v2(258,-143) 258,-289 227,-320 U71.1 ; U72.1 257.61,-170.39
PCK_IO: P7.20 RS12.5 | length 100.7
  Bottom Layer w10: P7.20 -88.58,524.58 -84,520 -84,482.73 RS12.5
RESET: C268.2 JP8.1 K8.2 R199.2 U66.29 | length 1140.4
  Top Layer w10: C268.2@-749.59,382 JP8.1 ; K8.2 -397.11,735 -415,717.11 R199.2 -415,521 -392,498 -247.13,498 -235,498 -217.75,480.75 U66.29 -217.75,372.25 v1(-218,372)
  Bottom Layer w10: JP8.1 -670,412 -258,412 v1(-218,372)
RX/B: D32.1 P26.3 P28.3 R206.2 R207.2 U67.7 | length 797.6
  Top Layer w10: v1(-721,73.82) P26.3 ; D32.1 -514,-354 ; R207.2 R206.2 -360.59,-380.41 -350,-391 U67.7
  Bottom Layer w10: v1(-721,73.82) -721,-35 -682.18,-73.82 P28.3
RXI: P25.4 U66.30 U67.1 | length 1285.6
  Top Layer w10: v1(-326,-217) -300,-243 U67.1 ; v1(-249.24,469) U66.30 -249.24,331.24 v1(-206.52,288.52) v1@-203,285
  Bottom Layer w10: P25.4 -541.98,442 -512.3,471.69 -251.93,471.69 v1(-249.24,469) ; v1(-326,-217) -336,-207 -336,-10 -320,6 -202.79,6 -166,42.79 -166,248 v1(-206.52,288.52)
RXVDDQ: C159.2 C160.1 L15.2 U10.A2 | length 230.7
  Top Layer w10: v1(664,-140.86) 648.86,-156 L15.2 607,-202.5 C159.2 641.68,-236.82 C160.1
  Bottom Layer w6: v1(664,-140.86) U10.A2
SCK: JP8.5 U66.17 | length 644.8
  Top Layer w10: v1(-97,133.11) U66.17
  Bottom Layer w10: JP8.5 JP8.5@-499,381 ; JP8.5@-499,382 JP8.5@-499,381 ; v1(-97,133.11) -97,259 -187,349 -467,349 JP8.5@-499,381
SST_N: U10.A6 | length 21.1
  Bottom Layer w6: U10.A6 700,0
SST_P: U10.A5 | length 13.6
  Bottom Layer w6: U10.A5 692.49,-31.49
STB_IO: P7.2
TIGG_IO: P7.3 R35.1 | length 154
  Bottom Layer w10: P7.3 246.06,548.94 255,540 284.21,540 337,487.21 R35.1
TX/A: D32.2 P26.2 P28.2 R205.2 R206.1 U67.6 | length 827.1
  Top Layer w10: v1(-648,-123) -711,-123 -743,-91 -743,103 -722.97,123.03 P26.2 ; D32.2 R206.1@-516.41,-434 ; R205.2 R206.1 -418.41,-431.59 -400,-450 U67.6
  Bottom Layer w10: v1(-648,-123) P28.2
TXO: P25.3 U66.31 U67.4 | length 1362.2
  Top Layer w10: P25.3 -591.98,442 -562.3,471.69 -298.69,471.69 -280.74,453.74 U66.31 -280.74,318.74 v1@-207.5,245.5 ; U67.4 -450,-276 -426,-252 -360,-252 v1(-351,-243)
  Bottom Layer w10: v1(-351,-243) -351,-2 -328,21 -209,21 -181,49 -181,220.5 v1(-206,245.5)
TXVDDQ: C145.2 C147.1 L16.2 U10.B5 | length 318.8
  Top Layer w10: C147.1 C145.2@580.32,-236.82 ; C145.2 580.5,-123.5 L16.2 642,-98 660,-80 660,-79 v1(663,-79)
  Bottom Layer w6: U10.B5 663,-47.08 v1(663,-79)
USB_DS4_DM: U10.A10
USB_DS4_DP: U10.A9
USB_DS4_RXM: U10.A4
USB_DS4_RXP: U10.A3
USB_DS4_TXM: 
USB_DS4_TXP: 
UTIGGER: P24.1 R204.2 S8.5 S8.6 | length 149.4
  Top Layer w10: S8.5 S8.6 ; R204.2@231,-737 P24.1 P24.1@302.41,-748.59
VCC(+3.3V): C127.2 C135.1 C136.1 C137.1 C138.1 C139.1 C140.1 C149.1 C150.1 C151.1 C152.1 C153.1 C154.1 C155.1 C156.1 C157.1 L13.2 P7.27 P7.28 P7.29 P7.30 R34.2 R36.2 R37.2 R38.1 R39.1 R40.2 R41.2 U10.B1 U10.C11 U10.E3 U10.E10 U10.F1 U10.H11 U10.L9 U11.8 U12.8 | length 700.5
  Top Layer w10: R37.2 466,-118.43 466,-24 508,18 L13.2
  Bottom Layer w6: U10.L9 380,110.47 380,141 ; 380,154 380,141 ; U10.H11 458.47,182 ; U10.E10 552.94,132.94 569,149 569,198.72 574,203.72 574,220.28 562.28,232 443,232 380,169 380,141 ; U10.C11 615.92,201.92
  other v1: 460,203
VCC(+5V): C128.1 C270.1 C271.2 JP8.2 P25.2 R199.1 R200.1 R201.1 R202.1 R203.1 R205.1 R209.2 U10.E11 U66.4 U66.6 U66.18 U67.8 | length 2194.7
  Top Layer w20: JP8.2 P25.2 -597,495 -500.42,495 -466.18,529.24 R199.1 ; R205.1 -514,-566 -481,-599 -326,-599 -300,-573 U67.8 -240.8,-498 -239,-496.2 R209.2 ; v2(-441,259) -440.9,259.1 U66.4 -333.1,259.1 -270.11,196.11 U66.6 ; v4@-262,196 -107,196 -75.61,164.61 U66.18 ; U66.18@-32.57,164.18 v2(42,164.18) C270.1@42,128 ; C270.1 C270.1@41,127
  Bottom Layer w10: v2(42,164.18) 58.82,181 v1(170,181) ; U10.E11 v1(552.94,212)
  Bottom Layer w15: R201.1 R202.1 -272.07,206.18 v4(-262,196.11) ; v4@-252.52,205.59 R203.1 -240.82,221.41 R200.1
  Bottom Layer w20: JP8.2 -650,322 -587,259 v2(-441,259)
VCC_9V: P26.8 P27.1 P28.8 U68.2 U69.2 U70.2 U71.2 U72.2 U73.2 U74.2 U75.2 U76.2 U77.2 U78.2 U79.2 | length 1836
  Top Layer w20: U74.2 -124.4,-357.4 v2(-107,-340) v2(-107,-189) ; U75.2 -125.79,-207.79 v2(-107,-189) ; U76.2 -127.81,-58.19 v2(-107,-79) v2(-107,-189) ; U68.2 120,-357 v2(136,-341) ; U69.2 v2(135,-208) ; U70.2 119,-58 v2(136,-75)
  Top Layer w25: v3(-672.24,-172.24) P26.8
  Bottom Layer w20: v2(-107,-340) -90,-357 U77.2 ; v2(-107,-189) -88,-208 U78.2 ; v2(-107,-79) -86,-58 U79.2 ; v2@136.21,-207.79 U72.2 ; U71.2 152.4,-357.4 v2(136,-341) v2(136,-75) 152.81,-58.19 U73.2
  Bottom Layer w25: v3(-672.24,-172.24) -736.76,-172.24 -754,-155 -754,137 -718.76,172.24 P28.8
VDD(+1.2V): C129.1 C130.1 C131.1 C132.1 C141.1 C142.1 C143.1 C144.1 C158.2 L14.1 L15.1 L16.1 U10.B10 U10.C3 U10.E9 U10.F11 U10.H1 U10.J11 U10.L5 U10.L7 | length 868.8
  Bottom Layer w6: U10.L5 379.51,-31.49 380,-31 ; U10.L7 380,15.49 380,-31 ; U10.J11@426.98,155.98 U10.J11 426.98,188.42 441.56,203 525,203 538,190 538,157 ; U10.H1 458.47,-143 ; U10.F11 537.55,157.45 538,157 ; U10.C3 603,-107.39 603,-134.33 594.32,-143 458.47,-143 ; U10.B10 636.96,125.96 620,109 603,109 597.36,103.36 597.36,89.12 589.78,81.54 565.86,81.54 U10.E9 538,109.41 538,157 ; 380,-31 380,-38 389,-47 406,-47 412,-53 412,-133 422,-143 458.47,-143
XCK_IO: P7.19
XTAL_IN: C122.2 U10.C6 Y4.1 | length 635.1
  Top Layer w6: C122.2 476,-197.56 506,-167.56 v1(505.98,-47.02)
  Top Layer w10: Y4.1 414.62,-459.82 C122.2@474,-459.82 ; C122.2@473.68,-459.5 C122.2@474,-459.82 ; C122.2@476,-461.82 C122.2@474,-459.82 ; C122.2 C122.2@474,-459.82
  Bottom Layer w6: v1(505.98,-47.02) 595,-47 603,-39 603,-12.93 U10.C6
XTAL_OUT: C121.2 U10.C7 Y4.2 | length 823.8
  Top Layer w6: Y4.2 373,-477.19 373,-447 391,-429 452,-429 464.5,-416.5 464.5,-193.5 485,-173 485,-37 v1(505.97,-15.97) v1(505.97,-15.97)
  Top Layer w10: C121.2 327.38,-522.18 Y4.2 Y4.2@328,-522.8
  Bottom Layer w6: v1(505.97,-15.97) 563,-16 570,-9 570,12 576.82,18.82 578.82,18.82 579.08,18.57 603,18.57 610.21,25.79 ; 607.21,22.79 610.21,25.79 ; U10.C7 610.21,25.79
pads on no net: C146.1 C146.2 C148.1 C148.2 P7.31 P26.9 P27.7 P28.9 R43.2 RS12.3 RS12.6 U10.A11 U10.B11 U10.C4 U10.C10 U10.D1 U10.D2 U10.D3 U10.D7 U10.D11 U10.E1 U10.E4 U10.E5 U10.E7 U10.E8 U10.F2 U10.F3 U10.F4 U10.F5 U10.F6 U10.G2 U10.G3 U10.H2 U10.H3 U10.H6 U10.J1 U10.J2 U10.J3 U10.J4 U10.K1 U10.K2 U10.K5 U10.L4 U11.1 U11.2 U11.3 U11.7 U12.1 U12.2 U12.3 U12.7 Y4.3 Y4.4

## Keep-outs
Keep-Out Layer:
  lines w7.87: 629.92,787.4 cw(c629.92,629.92) 787.4,629.92 ; 629.92,787.4 787.4,787.4 787.4,629.92 ; 629.92,787.4 -629.92,787.4 ccw(c-629.92,629.92) -787.4,629.92 -787.4,-629.92 ccw(c-629.92,-629.92) -629.92,-787.4 629.92,-787.4 ccw(c629.92,-629.92) 787.4,-629.92 787.4,629.92

## Text inside footprints (layer, text, board x,y; h text height)
P7: Bottom Overlay "30" at -305,545.55 h60 r180; Bottom Overlay "1" at 301,554.55 h60 r180
S8: Top Overlay "6" at 115,-697 h19.68; Top Overlay "5" at 70,-697 h19.68; Top Overlay "1" at -130,-697 h19.68; Top Overlay "2" at -80,-697 h19.68; Top Overlay "3" at -30,-697 h19.68; Top Overlay "4" at 15,-697 h19.68; Top Overlay "ON" at 151,-473 h60
U10: Bottom Overlay "L" at 355.05,-230.6 h55 r270; Bottom Overlay "A" at 649.05,-235.6 h55 r270; Bottom Overlay "11" at 731.45,205 h55; Bottom Overlay "1" at 753.95,-185.2 h55; Mechanical 15 "A" at 681.45,-230 h55 r270; Mechanical 15 "L" at 346.45,-229 h55 r270; Mechanical 15 "11" at 731.45,150 h55 r270; Mechanical 15 "1" at 736.45,-165 h55 r270; Mechanical 16 "E10" at 586.54,125.96 h55 r270; Mechanical 16 "D11" at 618.03,157.45 h55 r270; Mechanical 16 "A11" at 712.5,157.45 h55 r270; Mechanical 16 "C9" at 638.32,94.47 h55 r270; Mechanical 16 "F2" at 543.85,-125.96 h55 r270; Mechanical 16 "E3" at 575.34,-94.47 h55 r270; Mechanical 16 "F1" at 543.85,-157.45 h55 r270; Mechanical 16 "L9" at 386.4,94.47 h55 r270; Mechanical 16 "H11" at 492.07,157.45 h55 r270; Mechanical 16 "J4" at 449.38,-62.98 h55 r270; Mechanical 16 "F4" at 543.85,-62.98 h55 r270; Mechanical 16 "J3" at 449.38,-94.47 h55 r270; Mechanical 16 "J1" at 449.38,-157.45 h55 r270; Mechanical 16 "E4" at 575.34,-62.98 h55 r270; Mechanical 16 "E5" at 575.34,-31.49 h55 r270; Mechanical 16 "G2" at 512.36,-125.96 h55 r270; Mechanical 16 "F5" at 543.85,-31.49 h55 r270; Mechanical 16 "K2" at 417.89,-125.96 h55 r270; Mechanical 16 "E1" at 575.34,-157.45 h55 r270; Mechanical 16 "G8" at 512.36,62.98 h55 r270; Mechanical 16 "L10" at 397.6,125.96 h55 r270; Mechanical 16 "F8" at 543.85,62.98 h55 r270; Mechanical 16 "F3" at 543.85,-94.47 h55 r270; Mechanical 16 "K1" at 417.89,-157.45 h55 r270; Mechanical 16 "J10" at 460.58,125.96 h55 r270; Mechanical 16 "G6" at 512.36,0 h55 r270; Mechanical 16 "K6" at 417.89,0 h55 r270; Mechanical 16 "K9" at 417.89,94.47 h55 r270; Mechanical 16 "J9" at 449.38,94.47 h55 r270; Mechanical 16 "F10" at 555.05,125.96 h55 r270; Mechanical 16 "H9" at 480.87,94.47 h55 r270; Mechanical 16 "J5" at 449.38,-31.49 h55 r270; Mechanical 16 "G9" at 512.36,94.47 h55 r270; Mechanical 16 "K11" at 429.09,157.45 h55 r270; Mechanical 16 "G10" at 523.56,125.96 h55 r270; Mechanical 16 "H10" at 492.07,125.96 h55 r270; Mechanical 16 "J8" at 449.38,62.98 h55 r270; Mechanical 16 "K10" at 429.09,125.96 h55 r270; Mechanical 16 "F7" at 543.85,31.49 h55 r270; Mechanical 16 "G5" at 512.36,-31.49 h55 r270; Mechanical 16 "K5" at 417.89,-31.49 h55 r270; Mechanical 16 "H8" at 480.87,62.98 h55 r270; Mechanical 16 "H6" at 480.87,0 h55 r270; Mechanical 16 "H5" at 480.87,-31.49 h55 r270; Mechanical 16 "F9" at 543.85,94.47 h55 r270; Mechanical 16 "H3" at 480.87,-94.47 h55 r270; Mechanical 16 "G3" at 512.36,-94.47 h55 r270; Mechanical 16 "H2" at 480.87,-125.96 h55 r270; Mechanical 16 "J2" at 449.38,-125.96 h55 r270; Mechanical 16 "B11" at 681.01,157.45 h55 r270; Mechanical 16 "E8" at 575.34,62.98 h55 r270; Mechanical 16 "C10" at 649.52,125.96 h55 r270; Mechanical 16 "E7" at 575.34,31.49 h55 r270; Mechanical 16 "F6" at 543.85,0 h55 r270; Mechanical 16 "B6" at 669.81,0 h55 r270; Mechanical 16 "D2" at 606.83,-125.96 h55 r270; Mechanical 16 "C4" at 638.32,-62.98 h55 r270; Mechanical 16 "C5" at 638.32,-31.49 h55 r270; Mechanical 16 "D1" at 606.83,-157.45 h55 r270; Mechanical 16 "D4" at 606.83,-62.98 h55 r270; Mechanical 16 "K8" at 417.89,62.98 h55 r270; Mechanical 16 "J6" at 449.38,0 h55 r270; Mechanical 16 "J7" at 449.38,31.49 h55 r270; Mechanical 16 "C8" at 638.32,62.98 h55 r270; Mechanical 16 "B3" at 669.81,-94.47 h55 r270; Mechanical 16 "H7" at 480.87,31.49 h55 r270; Mechanical 16 "A5" at 701.3,-31.49 h55 r270; Mechanical 16 "G7" at 512.36,31.49 h55 r270; Mechanical 16 "A6" at 701.3,0 h55 r270; Mechanical 16 "K7" at 417.89,31.49 h55 r270; Mechanical 16 "C2" at 638.32,-125.96 h55 r270; Mechanical 16 "D3" at 606.83,-94.47 h55 r270; Mechanical 16 "D5" at 606.83,-31.49 h55 r270; Mechanical 16 "D7" at 606.83,31.49 h55 r270; Mechanical 16 "D6" at 606.83,0 h55 r270; Mechanical 16 "C1" at 638.32,-157.45 h55 r270; Mechanical 16 "E9" at 575.34,94.47 h55 r270; Mechanical 16 "B10" at 681.01,125.96 h55 r270; Mechanical 16 "L7" at 386.4,31.49 h55 r270; Mechanical 16 "L5" at 386.4,-31.49 h55 r270; Mechanical 16 "H1" at 480.87,-157.45 h55 r270; Mechanical 16 "C3" at 638.32,-94.47 h55 r270; Mechanical 16 "J11" at 460.58,157.45 h55 r270; Mechanical 16 "F11" at 555.05,157.45 h55 r270; Mechanical 16 "D9" at 606.83,94.47 h55 r270; Mechanical 16 "D10" at 618.03,125.96 h55 r270; Mechanical 16 "A4" at 701.3,-62.98 h55 r270; Mechanical 16 "E11" at 586.54,157.45 h55 r270; Mechanical 16 "A7" at 701.3,31.49 h55 r270; Mechanical 16 "A10" at 712.5,125.96 h55 r270; Mechanical 16 "A9" at 701.3,94.47 h55 r270; Mechanical 16 "A3" at 701.3,-94.47 h55 r270; Mechanical 16 "G4" at 512.36,-62.98 h55 r270; Mechanical 16 "H4" at 480.87,-62.98 h55 r270; Mechanical 16 "L8" at 386.4,62.98 h55 r270; Mechanical 16 "L4" at 386.4,-62.98 h55 r270; Mechanical 16 "C7" at 638.32,31.49 h55 r270; Mechanical 16 "B2" at 669.81,-125.96 h55 r270; Mechanical 16 "B4" at 669.81,-62.98 h55 r270; Mechanical 16 "E6" at 575.34,0 h55 r270; Mechanical 16 "C6" at 638.32,0 h55 r270; Mechanical 16 "B1" at 669.81,-157.45 h55 r270; Mechanical 16 "C11" at 649.52,157.45 h55 r270; Mechanical 16 "A2" at 701.3,-125.96 h55 r270; Mechanical 16 "B5" at 669.81,-31.49 h55 r270; Mechanical 16 "L6" at 386.4,0 h55 r270; Mechanical 16 "A1" at 701.3,-157.45 h55 r270; Mechanical 16 "E2" at 575.34,-125.96 h55 r270; Mechanical 16 "L2" at 386.4,-125.96 h55 r270; Mechanical 16 "L1" at 386.4,-157.45 h55 r270; Mechanical 16 "K3" at 417.89,-94.47 h55 r270; Mechanical 16 "G1" at 512.36,-157.45 h55 r270; Mechanical 16 "K4" at 417.89,-62.98 h55 r270; Mechanical 16 "L3" at 386.4,-94.47 h55 r270; Mechanical 16 "A8" at 701.3,62.98 h55 r270; Mechanical 16 "B8" at 669.81,62.98 h55 r270; Mechanical 16 "B9" at 669.81,94.47 h55 r270; Mechanical 16 "D8" at 606.83,62.98 h55 r270; Mechanical 16 "B7" at 669.81,31.49 h55 r270; Mechanical 16 "L11" at 397.6,157.45 h55 r270; Mechanical 16 "G11" at 523.56,157.45 h55 r270